# Altium PCB remora-2.PcbDoc (part 2 of 2)
Units mm, origin at the board's own origin, x right, y up, seen from the top; angles counter-clockwise.
Board outline 127 x 44.45 mm, 4 copper layers (Top Layer, GND, VCC, Bottom Layer), stack 0.778 mm thick; 128 components, 115 nets, 566 pads, 152 vias.
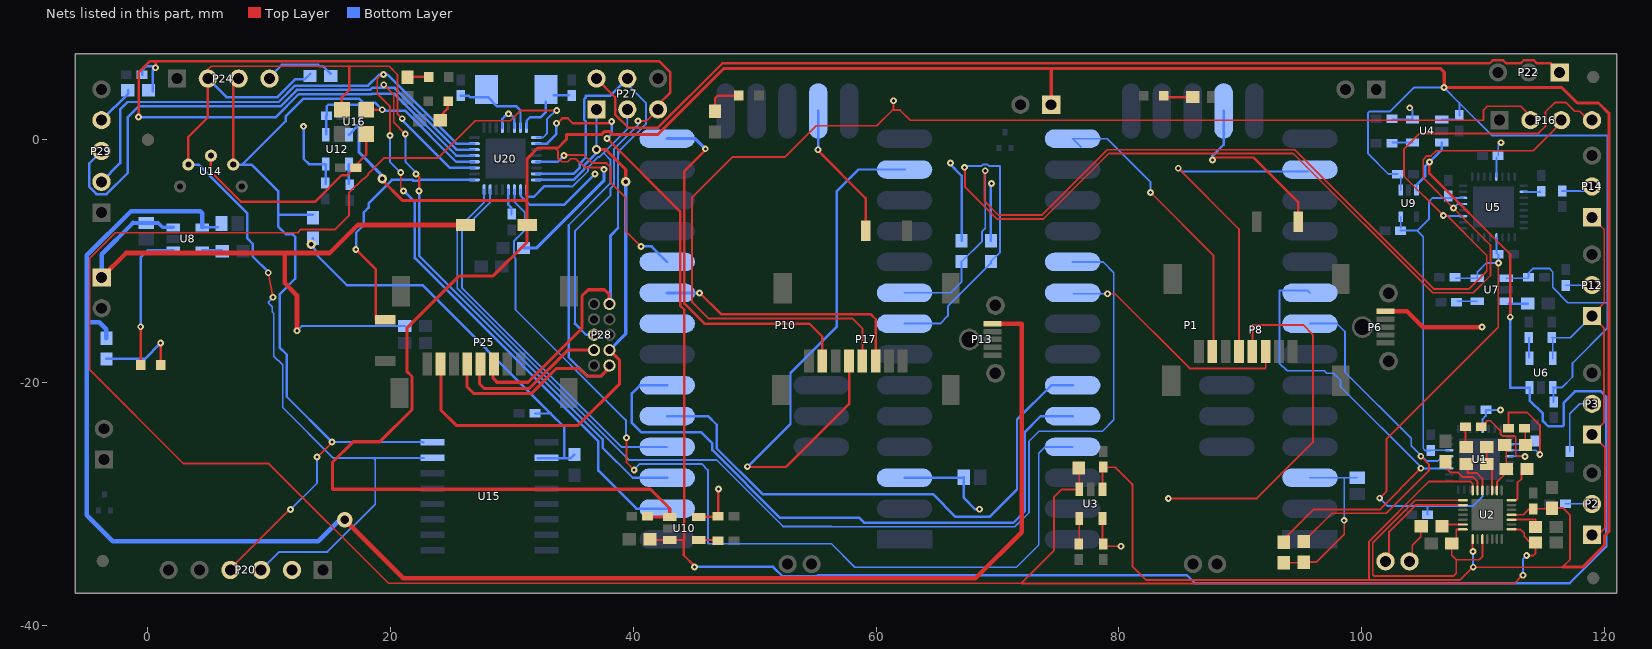
[diagram p4: the nets of this part, all layers, seen from the top]

## Via types
v1: diameter 0.559, hole 0.254, Top Layer to Bottom Layer, 141 vias
v2: diameter 0.762, hole 0.381, Top Layer to Bottom Layer, 6 vias
v3: diameter 0.5, hole 0.2, Top Layer to Bottom Layer, 4 vias
v4: diameter 1.27, hole 0.711, Top Layer to Bottom Layer, 1 vias

## Nets (pads, with @x,y where several pads share a name; then routed paths per layer and width w, separated by ;. In a path a pad name is that pad's centre, name@x,y a point inside that pad or via, vN(x,y) a via of type N, cw(c..) or ccw(c..) an arc to the next point about the centre after c; other vN are vias at no path point) (continued)
MISO: P25.7 P27.1 P28.7 U20.16 | length 51.5
  Top Layer w0.254: P25.7@24.129,-18.336 24.129,-22.26 25.399,-23.53 35.432,-23.53 38.861,-20.101 38.861,-18.171 P28.7@38.023,-17.333 ; v2(36.956,-0.797) 37.718,-0.797 39.369,-2.448 39.369,-3.083
  Bottom Layer w0.203: U20.16@31.997,-3.309 35.066,-3.309 35.94,-2.435 35.94,-2.108 36.956,-1.092 P27.1@36.956,2.505
  Bottom Layer w0.254: P28.7@38.023,-17.333 39.369,-15.986 v2(39.369,-3.464)
MISO_P: P1.12 P8.7 | length 25.4
  Top Layer w0.152: v1@82.612,-4.34 87.781,-9.509 P8.7@87.781,-17.206 ; P8.7@87.694,-17.447 P8.7@87.694,-16.874
  Bottom Layer w0.152: P1.12@76.894,-0.619 P1.12@76.183,0.092 79.044,0.092 82.6,-3.464 v1(82.6,-4.353)
MISO_R: P10.12 P17.7 | length 31.4
  Top Layer w0.203: v1@45.973,-0.797 44.195,-2.575 44.195,-13.497 45.846,-15.148 54.482,-15.148 55.563,-16.229 P17.7@55.563,-18.209
  Bottom Layer w0.254: P10.12@42.782,0.092 45.084,0.092 v1(45.922,-0.746)
MOSI: P25.3 P27.4 P28.1 U20.15 | length 51.1
  Top Layer w0.254: P25.3@28.422,-18.336 28.422,-19.619 28.726,-19.923 28.726,-19.974 31.317,-19.974 35.762,-15.529 35.762,-12.862 36.27,-12.354 37.616,-12.354 37.997,-12.735 P28.1@37.997,-13.497
  Bottom Layer w0.152: 38.734,-7.274 38.734,-1.209 ; 38.734,-0.995 41.045,1.316 41.045,3.014 P27.4@39.496,4.564
  Bottom Layer w0.203: U20.15@31.997,-2.809 35.063,-2.809 35.584,-2.288 35.584,-1.961 36.067,-1.478 36.067,1.535 35.952,1.65 35.952,3.36 36.067,3.475 36.067,3.648 38.099,3.648 P27.4@39.496,5.045 ; 38.734,-1.209 38.734,-0.995
  Bottom Layer w0.254: P28.1@38.124,-13.523 38.124,-7.884 38.734,-7.274 ; P27.4@39.496,4.564 P27.4@39.496,5.045
MOSI_P: P1.7 P8.3 | length 19.7
  Top Layer w0.152: v1(79.069,-12.684) 79.679,-12.684 85.826,-18.831 92.023,-18.831 92.094,-18.76 P8.3@92.094,-17.447
  Bottom Layer w0.152: P1.7@76.259,-12.684 v1(79.069,-12.684)
MOSI_R: P10.7 P17.3 | length 21.3
  Top Layer w0.203: v1@45.465,-12.608 47.243,-14.386 59.562,-14.386 59.963,-14.787 P17.3@59.963,-18.209
  Bottom Layer w0.254: P10.7@42.782,-12.608 v1@45.287,-12.608
  other v1: 45.44,-12.634
Net*1_1: *1.1 C63.2 U20.7 | length 6.8
  Bottom Layer w0.203: C63.2@25.779,3.633 26.429,3.633 26.541,3.521 28.013,3.521 28.775,2.759 30.352,2.759 30.697,2.414 U20.7@30.697,0.991
Net*1_2: *1.2 C64.2 U20.8 | length 4.6
  Bottom Layer w0.203: U20.8@31.197,0.991 31.197,1.572 31.495,1.87 32.384,1.87 32.765,2.251 *1.2@32.765,3.14 ; *1.2@33.436,3.663 C64.2@34.67,3.663
NetC2_1: C2.1 P2.2 | length 2.2
  Bottom Layer w0.152: C2.1@116.778,-29.982 P2.2@118.957,-29.982
NetC3_1: C3.1 P3.2 | length 5.3
  Bottom Layer w0.152: C3.1@117.144,-25.674 117.144,-22.565 117.957,-21.752 P3.2@118.982,-21.752
NetC6_1: C6.1 U1.10 | length 1.8
  Bottom Layer w0.152: U1.10@112.211,-25.074 C6.1@114.015,-25.074
NetC8_2: C8.2 U2.3 | length 2.6
  Top Layer w0.152: U2.3@112.346,-31.296 114.343,-31.296 114.343,-31.891 C8.2@114.322,-31.912
NetC11_1: C11.1 R4.1 | length 1.5
  Top Layer w0.152: R4.1@113.482,-25.308 C11.1@113.482,-23.857
NetC12_1: C12.1 R5.1 | length 1.6
  Top Layer w0.152: R5.1@108.553,-25.254 C12.1@108.553,-23.657
NetC15_1: C15.1 U3.4 | length 2
  Top Layer w0.152: C15.1@76.733,-33.252 U3.4@76.733,-31.203
NetC16_2: C16.2 U2.15 U2.21 U2.24 | length 26.7
  Top Layer w0.152: U2.21@108.346,-32.096 107.79,-32.096 107.79,-32.895 C16.2@107.427,-33.258 107.427,-34.235 107.797,-34.605 ; U2.15@108.346,-29.696 104.418,-29.696 100.913,-33.201 100.913,-35.849 101.015,-35.951 107.543,-35.951 107.797,-35.697 107.797,-34.605 ; U2.24@109.946,-32.896 109.946,-34.335 109.676,-34.605 107.797,-34.605
NetC21_1: C21.1 U4.4 | length 1.6
  Bottom Layer w0.152: C21.1@102.553,-0.223 U4.4@104.193,-0.223
NetC27_1: C27.1 U6.4 | length 1.6
  Bottom Layer w0.152: U6.4@113.775,-17.946 C27.1@113.775,-16.306
NetC28_1: C28.1 U5.10 | length 1.4
  Bottom Layer w0.152: U5.10@113.354,-4.29 C28.1@114.742,-4.29
NetC33_1: C33.1 U7.4 | length 1.6
  Bottom Layer w0.152: C33.1@107.887,-13.304 U7.4@109.527,-13.304
NetC36_1: C36.1 P12.2 | length 2.1
  Bottom Layer w0.152: C36.1@116.823,-11.988 P12.2@118.967,-11.988
NetC41_1: C41.1 P14.2 | length 2.1
  Bottom Layer w0.152: C41.1@116.509,-4.211 P14.2@118.616,-4.211
NetC42_2: C42.2 U10.4 | length 1.5
  Top Layer w0.203: U10.4@45.395,-32.973 C42.2@46.908,-32.973
NetC43_2: C43.2 U12.4 | length 1.6
  Bottom Layer w0.203: C43.2@16.554,-3.637 U12.4@16.554,-1.997
NetC65_1: C65.1 U20.20 | length 2.1
  Bottom Layer w0.203: U20.20@29.697,-4.109 29.697,-5.349 29.955,-5.607 C65.1@29.955,-6.116
NetD1_A: D1.A R11.2 | length 2.3
  Top Layer w0.203: D1.A@83.806,3.521 R11.2@86.093,3.521
NetD2_A: D2.A R13.2 | length 6.9
  Top Layer w0.203: D2.A@1.05,-18.593 v1(1.05,-16.748)
  Bottom Layer w0.203: R13.2@-3.421,-18.056 -0.257,-18.056 v1(1.05,-16.748)
NetD2_K: D2.K U8.1 | length 11.8
  Top Layer w0.203: v1(-0.601,-15.402) -0.601,-18.253 D2.K@-0.572,-18.552
  Bottom Layer w0.203: v1(-0.601,-15.402) -0.601,-9.713 -0.002,-9.113 U8.1@2.085,-9.113
NetD3_A: D3.A R17.2 | length 3.1
  Top Layer w0.203: R17.2@46.735,2.339 46.735,3.419 46.964,3.648 D3.A@48.688,3.648
NetD4_A: D4.A R27.2 | length 1.5
  Top Layer w0.203: R27.2@21.437,5.184 D4.A@22.986,5.184
NetD5_A: D5.A R29.2 | length 1.8
  Top Layer w0.203: R29.2@24.09,1.616 24.09,1.974 24.684,2.568 D5.A@24.684,3.165
NetP5_1: P5.1 R2.2 | length 2.5
  Top Layer w0.152: P5.1@104.164,-34.503 104.164,-33.401 104.869,-32.697 R2.2@104.869,-32.323
NetR3_1: R3.1 R4.2 U2.9 | length 3.8
  Top Layer w0.152: U2.9@111.146,-28.896 111.146,-28.207 111.909,-27.444 111.909,-26.705 R4.2@111.909,-25.435
NetR3_2: R3.2 U2.7 | length 3.7
  Top Layer w0.152: U2.7@112.346,-29.696 112.355,-29.687 112.731,-29.687 112.835,-29.583 112.835,-28.271 113.181,-27.924 113.181,-27.133 R3.2@113.609,-26.705
NetR5_2: R5.2 R6.1 U2.10 | length 3.1
  Top Layer w0.152: R6.1@110.307,-26.705 R5.2@110.307,-25.308 ; U2.10@110.746,-28.896 R6.1@110.746,-27.144
NetR6_2: R6.2 U2.12 | length 3.2
  Top Layer w0.152: R6.2@108.607,-26.705 108.711,-26.809 108.711,-27.467 109.505,-27.467 109.946,-27.909 U2.12@109.946,-28.896
NetR7_2: R7.2 U2.13 | length 4.3
  Top Layer w0.152: R7.2@106.917,-26.539 106.917,-26.994 107.339,-27.416 107.945,-27.416 108.301,-27.772 109.136,-27.772 109.546,-28.182 U2.13@109.546,-28.896
NetR12_2: R12.2 U8.5 | length 1.6
  Bottom Layer w0.203: U8.5@4.485,-9.113 R12.2@6.068,-9.113
OUT+: R2.1 U2.20 | length 1.6
  Top Layer w0.152: R2.1@106.754,-31.696 U2.20@108.346,-31.696
OUT-: P5.2 U2.16 | length 9.6
  Top Layer w0.152: P5.2@102.631,-34.706 102.259,-34.335 102.259,-32.286 104.449,-30.096 U2.16@108.346,-30.096
OUT_L: C11.2 U1.11 | length 9.3
  Top Layer w0.152: C11.2@112.109,-23.784 112.109,-22.469 113.644,-22.469 114.68,-23.505 v1@114.68,-25.892
  Bottom Layer w0.152: U1.11@112.211,-25.574 114.362,-25.574 v1@114.68,-25.892
  other v1: 114.68,-25.918
OUT_R: C12.2 U1.12 | length 7
  Top Layer w0.152: C12.2@109.853,-23.657 110.362,-23.148 110.615,-23.148 111.43,-23.964 111.43,-24.229 111.595,-24.394 112.572,-24.394 112.699,-24.521 112.699,-25.969 112.8,-26.07 v1@113.334,-26.07
  Bottom Layer w0.152: U1.12@112.211,-26.074 v1@113.355,-26.074
  other v1: 113.449,-26.096
PGM_P: P1.PGM P4.2 | length 14.5
  Top Layer w0.203: v1(87.705,-1.661) 87.908,-1.458 91.083,-1.458 94.79,-5.164 P4.2@94.79,-6.512
  Bottom Layer w0.203: v1(87.705,-1.661) 87.705,-1.331 88.629,-0.407 P1.PGM@88.629,2.378
PGM_R: P9.2 P10.PGM | length 11.3
  Top Layer w0.203: v1@55.168,-0.848 59.132,-4.812 P9.2@59.132,-7.274
  Bottom Layer w0.203: v1(55.219,-0.823) 55.228,-0.813 P10.PGM@55.228,2.378
PLAY_POW: R1.2 R9.2 U2.1 U3.3 U20.9 | length 201.1
  Top Layer w0.152: v1(33.679,2.403) 30.683,2.403 29.845,1.565 26.956,1.565 23.882,-1.508 19.431,-1.508 18.142,-2.797 18.142,-2.892 17.83,-3.205 17.735,-3.205 16.56,-4.379 16.56,-6.259 15.433,-7.385 12.597,-7.385 12.327,-7.655 -2.684,-7.655 -4.79,-9.761 -4.79,-18.961 2.929,-26.68 9.965,-26.68 19.82,-36.535 71.941,-36.535 71.954,-36.522 ; R9.2@76.733,-27.089 U3.3@76.733,-28.803 75.279,-28.803 74.659,-29.423 74.659,-33.817 71.954,-36.522 ; U2.1@112.346,-32.096 113.058,-32.096 113.394,-32.433 113.394,-32.674 113.902,-33.182 R1.2@114.322,-33.182 114.322,-34.083 114.156,-34.249 v1(113.597,-34.249) ; v1@113.242,-35.875 112.556,-36.56 71.992,-36.56 71.954,-36.522
  Bottom Layer w0.152: U20.9@31.997,0.191 32.569,0.191 32.876,0.498 32.876,1.692 v1@33.714,2.53 ; v1(113.283,-35.875) 113.283,-34.563 v1(113.597,-34.249)
PLAY_ST: P1.8 U20.24 | length 94.3
  Bottom Layer w0.152: U20.24@27.697,-4.109 27.697,-5.141 25.485,-7.353 25.485,-12.226 39.633,-26.375 46.846,-26.375 52.332,-31.861 56.343,-31.861 56.369,-31.887 71.434,-31.887 72.592,-30.728 72.592,-24.835 73.414,-24.013 78.647,-24.013 79.577,-23.082 79.577,-10.948 78.698,-10.068 P1.8@76.183,-10.068
PLAY_STATUS: P1.2 U20.19 | length 79.8
  Top Layer w0.152: v1(39.429,-24.546) 39.429,-26.578 v1(40.064,-27.213)
  Bottom Layer w0.152: U20.19@30.197,-4.109 30.197,-5.103 31.047,-5.953 31.047,-7.447 30.4,-8.095 30.379,-8.095 30.379,-8.121 30.169,-8.33 30.169,-9.654 30.285,-9.77 30.285,-14.005 39.378,-23.098 v1@39.378,-24.597 ; v1@40.09,-27.137 40.521,-26.705 45.627,-26.705 46.135,-27.213 46.135,-33.284 56.32,-33.284 58.251,-35.214 71.56,-35.214 73.389,-33.385 73.389,-25.842 73.922,-25.308 P1.2@76.183,-25.308
POW: C35.2 P19.1 P21.1 R18.2 U8.3 | length 56.7
  Top Layer w0.381: P21.1@-3.811,-11.338 -1.804,-9.332 11.261,-9.332 ; v1(12.277,-15.732) 12.277,-12.811 11.261,-11.795 11.261,-9.332 ; P19.1@26.161,-7.02 17.271,-7.02 14.96,-9.332 11.261,-9.332
  Bottom Layer w0.152: v1(12.277,-15.732) 12.658,-15.351 R18.2@21.171,-15.351
  Bottom Layer w0.305: -1.233,-6.855 C35.2@-0.144,-6.855 0.85,-6.855 1.208,-7.213 U8.3@2.085,-7.213
  Bottom Layer w0.381: P21.1@-3.811,-11.338 -3.811,-9.433 -1.233,-6.855
REC_STATUS: P10.2 U20.23 | length 31.4
  Bottom Layer w0.152: U20.23@28.197,-4.109 28.197,-5.146 27.91,-5.433 25.866,-7.477 25.866,-12.176 38.997,-25.308 P10.2@42.782,-25.308
RESET: C62.1 P27.5 P28.6 R24.1 U20.29 | length 109.1
  Top Layer w0.152: v1(40.382,1.543) 41.074,1.543 P27.5@42.036,2.505
  Top Layer w0.203: v1@-0.763,1.87 -0.763,5.553 0.167,6.483 42.122,6.483 43.052,5.553 43.052,3.902 42.036,2.886 P27.5@42.036,2.505 ; v1(0.634,5.934) 0.634,6.458
  Bottom Layer w0.152: 35.178,-15.148 35.178,-7.528 38.099,-4.607 38.099,-4.022 38.404,-3.717 38.404,-0.746 40.385,1.235 v1@40.385,1.514
  Bottom Layer w0.203: v1@-0.636,1.87 10.54,1.87 12.42,3.749 18.439,3.749 18.465,3.775 20.319,3.775 25.403,-1.309 U20.29@26.897,-1.309 ; C62.1@-0.485,5.35 -0.485,5.72 -0.144,6.061 v1@0.507,6.061 ; R24.1@0.415,3.992 0.415,5.715 v1(0.634,5.934) ; 35.178,-15.148 36.092,-16.063 P28.6@36.753,-16.063
  other v1: -0.779,1.886
RXD: P10.1 P29.3 U20.30 | length 87.4
  Top Layer w0.152: v1(19.43,4.537) 20.252,3.715 20.252,1.429 v1(21.208,0.473)
  Top Layer w0.203: v1(22.097,-2.829) 22.335,-3.067 v1(22.335,-4.21)
  Bottom Layer w0.152: v1(21.208,0.473) 21.208,-1.813 21.97,-2.575
  Bottom Layer w0.203: P29.3@-3.827,-0.924 -4.831,-1.928 -4.831,-3.88 -4.243,-4.468 -3.411,-4.468 -1.655,-2.712 -1.655,1.867 -0.763,2.759 10.921,2.759 12.267,4.105 18.292,4.105 18.47,4.283 v1@19.43,4.283 ; v1(19.43,4.537) v1@19.43,4.283 ; v1@22.351,-4.226 22.351,-9.56 37.465,-24.674 37.465,-25.369 39.945,-27.848 P10.1@42.782,-27.848 ; U20.30@26.897,-0.809 25.411,-0.809 20.319,4.283 v1@19.43,4.283
RXD_R: P1.3 P10.4 | length 53.1
  Bottom Layer w0.203: P10.4@42.782,-20.228 40.537,-20.228 39.877,-20.889 39.877,-23.327 40.639,-24.089 45.567,-24.089 46.506,-25.029 46.506,-25.568 52.088,-31.15 58.622,-31.15 59.029,-31.557 71.297,-31.557 72.262,-30.591 72.262,-24.064 73.557,-22.768 P1.3@76.183,-22.768
SCK: P25.5 P27.3 P28.9 U20.17 | length 51.3
  Top Layer w0.254: P25.5@26.288,-18.336 26.288,-20.355 26.821,-20.889 31.611,-20.889 33.669,-18.831 35.508,-18.831 36.143,-19.466 37.337,-19.466 37.896,-18.907 P28.9@37.896,-18.577
  Bottom Layer w0.152: 34.67,-7.02 38.099,-3.591 38.099,-1.635 37.616,-1.153 ; 34.67,-3.845 34.997,-3.845 36.27,-2.572 36.27,-2.245 37.108,-1.407 37.209,-1.407 39.496,0.881 P27.3@39.496,2.505
  Bottom Layer w0.203: U20.17@31.197,-4.109 31.197,-4.61 31.277,-4.69 31.793,-4.69 32.638,-3.845 34.67,-3.845 ; 34.67,-7.02 34.67,-17.923 36.213,-19.466 37.337,-19.466 P28.9@37.845,-18.958
  Bottom Layer w0.254: P28.9@37.845,-18.958 P28.9@37.845,-18.577
SCK_P: P1.14 P8.5 | length 28
  Top Layer w0.152: v1(84.886,-2.347) 89.894,-7.355 P8.5@89.894,-17.447
  Bottom Layer w0.152: v1(84.886,-2.347) 85.14,-2.601 P1.14@95.589,-2.601
SCK_R: P10.14 P17.5 | length 46.6
  Top Layer w0.203: v1@49.386,-26.959 52.577,-26.959 57.763,-21.773 P17.5@57.763,-18.209 P17.5@58.038,-18.484
  Bottom Layer w0.203: v1@49.399,-26.946 52.942,-23.403 52.942,-19.212 56.743,-15.412 56.743,-4.252 58.546,-2.448 P10.14@62.34,-2.448
  other v1: 49.386,-26.934
SCL: P20.4 P24.3 R28.1 U14.4 U15.16 U16.3 U20.28 | length 84.4
  Top Layer w0.152: P20.4@6.866,-35.265 v1@11.718,-30.414 ; v1@13.978,-26.096 v1(15.172,-24.902)
  Top Layer w0.203: U14.4@7.03,-2.045 P24.3@7.03,4.599 ; U16.3@17.985,2.473 v1(19.303,2.473)
  Bottom Layer w0.152: v1(11.743,-30.464) 13.928,-28.28 v1(13.928,-26.146) ; v1(15.172,-24.902) 22.684,-24.902 U15.16@22.709,-24.927
  Bottom Layer w0.203: U14.4@7.03,-2.045 7.768,-2.045 ; R28.1@13.588,-6.17 10.755,-6.17 ; v1(15.172,-24.902) 11.438,-21.168 11.438,-17.701 10.843,-17.105 10.843,-12.734 12.124,-11.452 12.124,-7.985 11.908,-7.769 11.352,-7.769 10.755,-7.173 10.755,-6.17 ; U20.28@26.897,-1.809 25.395,-1.809 21.208,2.378 19.398,2.378 v1(19.303,2.473) 18.743,3.033 17.754,3.033 17.393,3.394 12.816,3.394 11.343,1.921 11.343,1.529 7.768,-2.045 ; 7.768,-2.045 8.546,-2.045 10.755,-4.254 10.755,-6.17
SCL_P: P1.19 R10.1 U1.29 | length 32.8
  Top Layer w0.152: R10.1@95.233,-33.094 97.558,-30.769 102.04,-30.769 105.545,-27.264 105.545,-26.74 v1(104.876,-26.07)
  Bottom Layer w0.152: P1.19@95.741,-15.148 97.967,-15.148 98.627,-15.809 98.627,-19.136 104.088,-24.597 104.088,-25.219 105.345,-26.477 106.247,-26.477 106.65,-26.074 U1.29@107.211,-26.074
SCL_R: P10.19 P16.3 R15.1 U5.29 | length 100.1
  Top Layer w0.152: v1@67.309,-2.245 67.309,-3.87 69.951,-6.512 73.785,-6.512 79.17,-1.127 94.361,-1.127 105.842,-12.608 109.19,-12.608 110.616,-11.182 110.616,-8.671 v1(107.568,-5.623) 105.079,-3.134 105.079,-1.628 105.376,-1.331 105.714,-1.331 106.146,-0.899 114.155,-0.899 116.442,1.388 P16.3@116.442,1.616
  Bottom Layer w0.152: P10.19@62.34,-15.148 65.277,-15.148 65.912,-14.513 65.912,-13.726 69.452,-10.186 R15.1@69.452,-10.029 70.205,-9.277 70.205,-2.169 69.323,-2.169 69.196,-2.042 68.775,-2.042 68.648,-2.169 67.385,-2.169 v1(67.284,-2.27) ; v1@107.679,-5.496 107.695,-5.496 107.901,-5.29 U5.29@108.354,-5.29
SDA: P20.3 P24.2 R26.1 U14.2 U15.15 U16.4 U20.27 | length 102.4
  Top Layer w0.152: P24.2@4.936,5.791 5.206,6.061 16.585,6.061 19.878,6.061 20.557,5.382 20.557,2.14 v1(20.954,1.743) ; v1(9.914,-10.957) v1(10.31,-12.975)
  Top Layer w0.203: U14.2@3.33,-2.045 3.33,0.248 4.936,1.854 P24.2@4.936,5.045 P24.2@4.936,5.791 ; U16.4@15.985,2.473 15.985,3.505 16.585,4.105 16.585,6.061
  Bottom Layer w0.152: P20.3@9.33,-35.468 P20.3@9.33,-35.443 10.818,-33.955 14.783,-33.955 18.728,-30.009 18.728,-26.353 18.598,-26.223 ; v1(10.31,-12.975) 9.947,-13.337 9.947,-13.464 10.243,-13.76 10.243,-14.182 10.372,-14.31 10.372,-17.816 11.108,-18.552 11.108,-22.058 15.273,-26.223 18.598,-26.223 ; U15.15@22.735,-26.223 18.598,-26.223
  Bottom Layer w0.203: U14.2@3.33,-2.045 4.152,-2.045 8.19,-6.083 8.19,-8.126 8.638,-8.574 8.638,-9.605 v1@9.965,-10.932 ; P24.2@4.936,5.045 6.46,3.521 10.677,3.521 12.15,4.994 12.941,4.994 R26.1@13.373,5.426 ; v1@20.89,1.679 24.879,-2.309 U20.27@26.897,-2.309
SDA_P: P1.18 R8.1 U1.27 | length 40.4
  Top Layer w0.152: R8.1@93.582,-33.145 93.582,-32.903 96.02,-30.464 101.472,-30.464 v1(104.876,-27.061)
  Bottom Layer w0.152: P1.18@95.741,-12.608 95.554,-12.421 93.226,-12.421 93.226,-18.409 93.852,-19.034 96.935,-19.034 97.138,-19.238 97.675,-19.238 98.256,-19.818 98.256,-20.355 104.975,-27.074 U1.27@107.211,-27.074
SDA_R: P10.18 P16.4 R14.1 U5.27 | length 100.1
  Top Layer w0.152: v1@68.935,-2.601 68.935,-5.064 70.078,-6.207 73.659,-6.207 79.044,-0.823 94.487,-0.823 105.968,-12.303 108.835,-12.303 110.311,-10.827 110.311,-9.535 107.009,-6.233 v1(106.73,-6.233) 103.479,-2.982 103.479,-0.797 104.799,0.524 114.562,0.524 115.147,1.108 115.147,2.302 115.909,3.064 116.848,3.064 117.56,2.352 117.957,2.352 118.693,1.616 P16.4@118.982,1.616
  Bottom Layer w0.152: P10.18@62.34,-12.608 66.141,-12.608 67.039,-11.71 R14.1@67.039,-10.029 68.723,-8.345 68.723,-7.551 68.985,-7.289 v1(68.985,-2.55) ; v1@106.672,-6.29 U5.27@108.354,-6.29
SGTL_EN_R: P10.6
SPOW: C9.2 C10.1 C13.1 C20.1 C25.1 C30.1 C32.1 C37.1 C39.1 P18.1 P19.2 R20.2 U2.4 U2.14 U2.22 U3.1 U4.1 U6.1 U7.1 U9.1 U10.1 U12.1 U12.3 | length 387.7
  Top Layer w0.152: 33.527,-0.67 33.781,-0.924 33.781,-1.516 34.079,-1.813 34.587,-1.813 34.841,-1.559 35.261,-1.559 35.973,-2.27 v1@37.413,-2.27 ; U3.1@78.633,-28.803 C13.1@78.633,-27.064 ; C13.1@78.723,-26.974 79.715,-26.974 81.111,-28.37 81.111,-35.138 82.228,-36.256 100.608,-36.256 108.127,-36.256 v1@109.168,-35.214 ; 100.608,-36.179 100.608,-33.075 105.53,-28.153 108.974,-28.153 109.146,-28.325 U2.14@109.146,-28.896 ; v1@109.146,-33.865 U2.22@109.146,-32.896 ; v1(109.194,-35.214) 116.534,-35.214 117.169,-34.579 117.169,-30.922 116.597,-30.349 C9.2@115.68,-30.349 ; U2.4@112.346,-30.896 113.308,-30.896 113.801,-30.403 C10.1@114.156,-30.403 C9.2@115.626,-30.403
  Top Layer w0.254: 15.198,-28.763 15.198,-28.757 ; v2@19.239,-3.274 20.954,-4.988 31.241,-4.988 ; v1@37.413,-2.27 v1(37.575,-2.432) ; C39.1@41.212,-31.073 U10.1@42.995,-31.073 42.995,-30.373 41.411,-28.789 15.229,-28.789 15.198,-28.757 ; 74.421,5.858 47.421,5.858 41.985,0.422 38.305,0.422 38.06,0.667 37.598,0.667 37.353,0.422 34.492,0.422 34.492,0.041 33.781,-0.67 33.527,-0.67 32.13,-0.67 31.241,-1.559 31.241,-4.988 ; 74.421,5.883 106.476,5.883 106.806,5.553 v1@106.806,4.299 ; v1(106.79,4.299) v1@106.806,4.299 ; 116.534,-35.214 118.21,-35.214 120.011,-33.413 120.011,-32.621 120.395,-32.237 120.395,2.159 119.515,3.038 117.774,3.038 116.513,4.299 v1@106.806,4.299 ; 15.198,-28.757 15.198,-26.583 16.905,-24.876 19.108,-24.876 21.755,-22.229 21.755,-19.497 21.335,-19.078 21.335,-15.529 25.653,-11.211 28.447,-11.211 31.241,-8.417 P19.2@31.241,-7.02 31.241,-4.988
  Top Layer w0.305: P18.1@74.421,2.886 74.421,5.858
  Bottom Layer w0.152: C37.1@102.965,-2.829 102.212,-2.829 100.508,-1.126 100.508,2.188 100.642,2.321 102.33,2.321 104.307,4.299 v1(106.79,4.299) 108.06,3.029 ; U9.1@103.219,-4.142 C37.1@103.219,-3.083 ; U4.1@106.593,1.677 C20.1@107.725,1.677 ; C20.1@108.06,2.012 108.06,3.029 ; v1@109.168,-35.113 v1(109.168,-33.919) ; U7.1@111.927,-11.404 C32.1@113.694,-11.404 ; C32.1@113.76,-11.338 113.76,-10.963 114.121,-10.602 115.447,-10.602 115.739,-10.893 115.739,-12.161 116.999,-13.421 120.217,-13.421 ; U6.1@115.741,-20.412 116.503,-20.412 117.372,-19.542 117.372,-18.399 120.243,-15.529 120.243,0.346 110.743,0.346 108.06,3.029 ; C25.1@115.807,-21.595 U6.1@115.807,-20.478
  Bottom Layer w0.203: U12.1@14.7,0.449 C30.1@14.7,1.997 ; C30.1@14.731,2.028 14.731,2.759 14.858,2.886 17.398,2.886 17.398,1.247 U12.3@16.554,0.403
  Bottom Layer w0.254: 17.398,1.247 17.398,-1.051 19.303,-2.956 v2(19.303,-3.21) ; R20.2@30.948,-8.925 32.003,-8.925 37.591,-3.337 v1@37.591,-2.448
STOP: P26.2 U20.25 | length 20.3
  Top Layer w0.203: v1(17.128,-9.036) 18.779,-10.687 P26.2@18.779,-14.845
  Bottom Layer w0.203: v1@17.144,-9.052 17.144,-7.655 17.779,-7.02 17.779,-5.98 18.177,-5.582 18.177,-5.234 20.102,-3.309 21.823,-3.309 21.876,-3.363 22.318,-3.363 22.371,-3.309 U20.25@26.897,-3.309
TEENSY_POW: R16.2 R25.1 U4.3 U6.3 U7.3 U9.3 U10.3 U20.10 | length 180.9
  Top Layer w0.203: v1(33.654,1.362) 33.732,1.362 34.144,1.774 34.586,1.774 34.998,1.362 v1@38.226,1.362 ; v1@37.845,0.092 43.839,-5.903 43.839,-13.644 44.195,-14 44.195,-32.928 44.15,-32.973 ; R16.2@41.423,-32.973 U10.3@42.995,-32.973 44.15,-32.973 ; v1@45.033,-35.113 44.15,-34.229 44.15,-32.973 ; v1(105.587,-1.839) 105.587,-2.778 112.242,-9.433 v1(112.242,-14.615)
  Bottom Layer w0.203: U20.10@31.997,-0.309 32.882,-0.309 33.654,0.463 v1(33.654,1.362) ; v1(37.829,0.108) 38.21,0.489 v1(38.21,1.505) ; v1(45.033,-35.189) 51.513,-35.189 52.288,-35.964 55.104,-35.964 55.193,-35.875 85.6,-35.875 86.26,-36.535 117.128,-36.535 120.141,-33.522 120.141,-21.168 119.709,-20.736 117.576,-20.736 116.661,-21.651 116.661,-23.505 116.567,-23.599 115.352,-23.599 114.934,-23.181 114.934,-22.565 113.841,-21.472 U6.3@113.841,-20.412 112.261,-20.412 112.261,-13.638 ; U9.3@104.519,-4.142 104.519,-3.694 104.56,-3.694 105.257,-2.997 105.257,-2.169 v1(105.587,-1.839) 106.593,-0.832 U4.3@106.593,-0.223 ; U7.3@112.12,-13.497 R25.1@113.687,-13.497
TEENSY_ST: P10.8 U20.13 | length 16.7
  Top Layer w0.152: v1(34.289,-1.305) 34.34,-1.254 35.945,-1.254 36.605,-1.915 37.776,-1.915 38.099,-2.238 38.099,-3.487 39.369,-4.757 39.369,-7.528 v1@40.512,-8.671
  Bottom Layer w0.203: U20.13@31.997,-1.809 33.785,-1.809 v1@34.162,-1.432 ; v1(40.623,-8.782) 41.496,-8.782 P10.8@42.782,-10.068
TXD: P10.0 P29.2 U20.31 | length 86.8
  Top Layer w0.152: v1(19.414,5.375) 19.22,5.375 18.89,5.045 18.89,3.807 19.938,2.759 v1(19.938,0.346) ; v1(20.827,-2.702) 20.827,-3.972 v1(21.065,-4.21)
  Bottom Layer w0.152: v1(19.938,0.346) 19.938,-1.813 v1(20.827,-2.702)
  Bottom Layer w0.203: P29.2@-3.827,-3.464 -2.287,-1.924 -2.287,2.505 -1.677,3.114 10.774,3.114 12.12,4.461 18.145,4.461 19.059,5.375 19.73,5.375 25.414,-0.309 U20.31@26.897,-0.309 ; v1@21.081,-4.226 21.995,-5.141 21.995,-9.754 37.11,-24.868 37.11,-27.256 40.242,-30.388 P10.0@42.782,-30.388
TXD_R: P1.4 P10.3 | length 45.8
  Bottom Layer w0.203: P10.3@42.782,-22.768 46.151,-22.768 46.862,-23.479 46.862,-25.421 50.635,-29.194 64.667,-29.194 66.547,-31.074 69.341,-31.074 71.602,-28.813 71.602,-23.048 74.421,-20.228 P1.4@76.183,-20.228
VA: C4.1 C19.1 C22.1 U1.5 U4.5 U5.5 | length 8.3
  Bottom Layer w0.152: C19.1@102.553,1.677 U4.5@104.193,1.677 104.193,2.4 v1(103.961,2.632) ; U1.5@109.961,-23.824 109.961,-23.017 110.234,-22.744 C4.1@110.234,-22.26 v1(111.429,-22.26) ; U5.5@111.104,-3.04 C22.1@111.104,-1.451 ; C22.1@111.25,-1.305 111.25,-0.468 v1(111.48,-0.238)
VCC: C47.1 C51.2 C53.2 P20.2 P22.1 P24.4 P25.4 P27.2 P28.8 P29.4 R22.1 R24.2 R26.2 R28.2 U12.5 U14.3 U15.2 U16.2 U20.4 U20.6 U20.18 | length 176.6
  Top Layer w0.203: U14.3@5.19,-1.305 5.19,-2.635 7.644,-5.09 13.791,-5.09 15.956,-2.925 16.414,-2.925 17.018,-2.321 C53.2@17.159,-2.321 17.159,-2.052 17.985,-1.226 U16.2@17.985,0.473 ; P27.2@36.956,5.045 38.492,3.509 38.492,2.089 39.571,1.01 42.034,1.01 47.314,6.289 110.552,6.289 110.819,6.557 111.651,6.557 111.918,6.289 113.092,6.289 113.359,6.557 114.191,6.557 114.458,6.289 115.578,6.289 P22.1@116.315,5.553
  Top Layer w0.254: P25.4@27.329,-18.336 27.329,-20.127 27.685,-20.482 31.443,-20.482 34.618,-17.307 36.194,-17.307
  Bottom Layer w0.152: C51.2@31.875,-22.54 33.181,-22.54
  Bottom Layer w0.203: P29.4@-3.827,1.616 -1.613,3.83 R24.2@-1.613,4.08 ; P24.4@10.016,5.045 10.016,5.156 11.04,6.18 14.028,6.18 14.147,6.061 14.438,6.061 R26.2@15.073,5.426 ; v1@12.826,0.981 12.826,-1.559 13.264,-1.997 U12.5@14.654,-1.997 C47.1@14.654,-3.637 ; R28.2@13.588,-8.124 13.588,-8.481 v2(13.461,-8.608) 13.461,-8.759 13.796,-9.093 13.796,-9.387 16.382,-11.973 22.614,-11.973 33.181,-22.54 34.296,-23.655 34.296,-26.169 34.349,-26.223 ; U20.4@29.197,0.991 29.197,1.731 29.463,1.997 29.971,1.997 30.197,1.771 U20.6@30.197,0.991 ; U20.18@30.697,-4.109 30.697,-4.613 31.454,-5.369 34.289,-5.369 v1(36.829,-2.829) ; U15.2@32.105,-26.223 34.349,-26.223 ; R22.1@35.137,-25.931 34.845,-26.223 34.349,-26.223
  other v1: 12.826,1.108 29.701,2.14
VCC_PLAY: C7.2 C14.1 P1.3.3V P8.4 R8.2 R10.2 U3.5 | length 47.9
  Top Layer w0.152: C14.1@78.633,-33.204 U3.5@78.633,-31.203 ; C14.1@78.916,-33.487 v1(80.161,-33.487) ; v1@84.098,-29.55 91.363,-29.55 95.986,-24.927 95.986,-16.063 95.173,-15.25 91.007,-15.25 91.007,-17.434 P8.4@90.994,-17.447 ; R8.2@93.582,-34.845 R10.2@95.182,-34.845 ; R10.2@95.233,-34.794 96.263,-34.794 98.56,-32.496 v1(98.56,-31.353)
  Bottom Layer w0.152: P1.3.3V@95.741,-27.848 98.56,-27.848 ; v1@98.332,-31.353 98.56,-31.125 98.56,-27.848 ; C7.2@99.63,-27.848 98.56,-27.848
  other v1: 84.073,-29.55
VCC_REC: C29.2 C40.1 P10.3.3V P16.2 P17.4 R14.2 R15.2 U10.5 | length 124.2
  Top Layer w0.152: P17.4@58.863,-18.209 58.863,-15.541 58.038,-14.716 46.176,-14.716 44.83,-13.37 44.83,-4.752 48.176,-1.407 52.501,-1.407 55.066,1.159 60.052,1.159 61.347,2.454 ; 61.426,2.454 61.957,2.454 62.795,1.616 110.041,1.616 110.041,2.454 110.346,2.759 113.115,2.759 113.902,1.971 P16.2@113.902,1.616 ; 61.426,2.532 v1(61.426,3.216)
  Top Layer w0.203: U10.5@45.395,-31.073 C40.1@46.908,-31.073 ; C40.1@46.974,-31.007 v1@46.974,-28.752
  Bottom Layer w0.203: P10.3.3V@62.34,-27.848 C29.2@67.077,-27.848 ; v1@66.039,-1.966 67.039,-2.966 R14.2@67.039,-8.329 ; C29.2@67.22,-27.797 67.22,-29.512 68.147,-30.439 v1(68.503,-30.439) ; R15.2@69.452,-8.329 v1@69.452,-3.658
  other v1: 47.014,-28.763 69.493,-3.591 66.115,-1.915
VDDD: C1.1 C17.1 C38.1 U1.30 U5.30 U9.5 | length 28.4
  Bottom Layer w0.152: C38.1@103.214,-7.477 104.571,-7.477 ; C38.1@103.219,-7.274 U9.5@103.219,-6.342 ; C1.1@105.688,-25.603 105.246,-25.603 105.079,-25.435 105.079,-7.985 104.571,-7.477 ; C1.1@105.717,-25.574 U1.30@107.211,-25.574 ; U5.30@108.354,-4.79 105.836,-4.79 105.561,-5.064 105.561,-6.487 104.571,-7.477
VDDIO: C5.1 C26.1 C31.1 U1.20 U5.20 U7.5 | length 40
  Top Layer w0.152: v1(101.481,-29.525) 102.056,-28.95 102.056,-24.648 111.251,-15.453 v1@111.251,-10.144
  Bottom Layer w0.152: v1(101.481,-29.525) 102.142,-30.185 109.143,-30.185 109.961,-29.367 U1.20@109.961,-28.824 ; C5.1@105.424,-30.896 105.424,-30.297 ; C31.1@107.76,-11.404 U7.5@109.527,-11.404 109.527,-10.903 110.286,-10.144 111.251,-10.144 111.276,-10.119 111.276,-9.49 C26.1@111.22,-9.433 ; C26.1@111.104,-9.317 U5.20@111.104,-8.04
  other v1: 111.276,-10.144
VH: C24.1 P2.1 P3.1 P12.1 P14.1 U6.5 | length 34.7
  Top Layer w0.152: P2.1@118.982,-32.547 119.481,-32.547 120.039,-31.988 120.039,-25.35 P3.1@118.982,-24.292 119.961,-23.314 119.961,-15.492 P12.1@118.982,-14.513 118.982,-14.428 119.989,-13.421 119.989,-7.392 P14.1@118.982,-6.385
  Bottom Layer w0.152: C24.1@115.68,-16.306 117.189,-16.306 P12.1@118.982,-14.513 ; U6.5@115.741,-18.012 C24.1@115.741,-16.367
XVUSB: C34.2 P13.1 R13.1 U8.4 | length 139.3
  Top Layer w0.381: v4(16.214,-31.303) 21.027,-36.116 68.185,-36.116 71.983,-32.319 71.983,-15.148 P13.1@69.579,-15.148
  Bottom Layer w0.203: U8.4@4.485,-7.213 C34.2@5.737,-7.213
  Bottom Layer w0.381: R13.1@-3.421,-16.356 -3.421,-15.605 -4.005,-15.021 -5.047,-15.021 ; U8.4@4.485,-7.213 4.485,-6.045 4.317,-5.877 -1.398,-5.877 -5.047,-9.526 -5.047,-15.021 ; v4(16.214,-31.303) 16.043,-31.473 15.63,-31.473 14.022,-33.081 -2.887,-33.081 -5.047,-30.921 -5.047,-15.021
XVUSB_P: P6.1 | length 8.5
  Top Layer w0.381: P6.1@101.964,-14.132 103.733,-14.132 105.053,-15.453 v1@109.914,-15.453
  other v1: 109.914,-15.428
pads on no net: P1.0 P1.1 P1.3.3V2 P1.5 P1.6 P1.15 P1.16 P1.20 P1.21 P1.A10 P1.A11 P1.A14 P1.AGND P1.AREF P1.GND2 P1.Vin P6. P6.4 P8.0 P8.1 P8.8 P10.3.3V2 P10.15 P10.16 P10.20 P10.21 P10.A10 P10.A11 P10.A14 P10.AGND P10.AREF P10.GND2 P10.Vin P13. P13.4 P17.0 P17.1 P17.8 P20.5 P20.6 P25.0 P25.1 P25.8 P28.3 P28.4 P28.5 U1.2 U1.4 U1.6 U1.8 U1.9 U1.16 U1.17 U1.18 U1.19 U1.22 U1.28 U2.2 U2.5 U2.6 U2.8 U2.11 U2.17 U2.19 U2.23 U2.25 U2.28 U5.2 U5.4 U5.6 U5.8 U5.9 U5.11 U5.12 U5.16 U5.17 U5.18 U5.19 U5.22 U5.28 U9.4 U14.1 U15.1 U15.4
copper on no net: | length 2.4
  Bottom Layer w0.254: 98.662,4.156 101.091,4.156

## Polygon pours and split planes (outlines as drawn)
DGND on GND (split plane): 99.92,-36.863 -5.476,-36.863 -5.476,6.566 99.92,6.566
AGND on GND (split plane): 120.504,-36.863 100.179,-36.863 100.179,6.566 120.504,6.566
VCC_REC on VCC (split plane): 73.25,-36.863 44.274,-36.863 44.274,6.566 73.25,6.566
VCC on VCC (split plane): 44.015,-36.863 -5.476,-36.863 -5.476,6.566 44.015,6.566
VA on VCC (split plane): 120.504,-36.863 100.204,-36.863 100.204,6.566 120.504,6.566
VCC_PLAY on VCC (split plane): 99.946,-36.863 73.509,-36.863 73.509,6.566 99.946,6.566

## Other copper
GND (plane layer: these items are gaps in the copper):
  lines w0.254: 100.05,-37.399 100.05,7.077
VCC (plane layer: these items are gaps in the copper):
  lines w0.254: 44.144,-37.653 44.144,6.747 ; 73.38,-37.272 73.38,7.128 ; 100.075,-37.373 100.075,7.026

## Silkscreen, mask and mechanical layers (free items; w line width, h text height)
Top Overlay:
  circle w0.254: c93.011,-15.8 r11.43
  circle w0.254: c93.086,-15.65 r14.707
  circle w0.254: c60.88,-16.689 r11.43
  circle w0.254: c60.955,-16.539 r14.707
  circle w0.254: c28.495,-16.435 r11.43
  circle w0.254: c28.57,-16.285 r14.707
  text "G" at 2.777,6.95 h1.52 r180
  text "D" at 5.19,6.95 h1.52 r180
  text "C" at 7.857,6.95 h1.52 r180
  text "V" at 10.397,6.95 h1.52 r180
  text "-" at 71.627,6.188 h1.52 r180
  text "V+" at 75.056,6.061 h1.52 r180
  text "RECORD" at 46.973,5.096 h2.54
  text "MOTION" at 26.196,4.842 h2.54
  text "PLAY (REC2)" at 80.298,4.842 h2.54
  text "G" at -5.859,4.664 h1.52 r270
  text "G" at 111.743,4.41 h1.52 r180
  text "H" at 114.156,4.41 h1.52 r180
  text "V" at 116.95,4.41 h1.52 r180
  text "V" at -5.859,2.124 h1.52 r270
  text "BURN2" at 75.462,1.235 h1.52 r180
  text "D" at 118.22,1.108 h1.52 r180
  text "V" at 114.512,0.295 h1.52 r180
  text "C" at 117.026,0.244 h1.52 r180
  text "G" at 111.921,0.219 h1.52 r180
  text "Rx" at -5.859,-0.289 h1.52 r270
  text "V" at 4.809,-0.289 h1.52
  text "C" at 7.476,-1.813 h1.52
  text "G" at 117.966,-1.813 h1.52 r90
  text "D" at 1.888,-1.94 h1.52
  text "Tx" at -5.859,-2.702 h1.52 r270
  text "G" at 8.619,-4.226 h1.52
  text "R1" at 117.966,-4.48 h1.52 r90
  text "DTR" at -5.859,-4.988 h1.52 r270
  text "V" at 118.093,-6.766 h1.52 r90
  text "PGM" at 87.384,-7.401 h1.52
  text "PGM" at 55.431,-8.062 h1.52
  text "ON" at 32.638,-8.163 h1.52
  text "CHG" at 67.547,-9.154 h1.52 r270
  text "G" at 117.839,-9.814 h1.52 r90
  text "V" at -5.716,-10.83 h1.52 r270
  text "BAT" at -2.922,-11.592 h1.52 r270
  text "L1" at 117.839,-12.735 h1.52 r90
  text "G" at -5.716,-13.497 h1.52 r270
  text "V" at 117.966,-14.894 h1.52 r90
  text "CHG" at 3.082,-18.933 h1.52
  text "G" at 117.839,-19.72 h1.52 r90
  text "ST" at 19.592,-21.27 h1.52 r90
  text "IMU_INT" at -4.437,-21.676 h1.52
  text "R2" at 117.839,-22.387 h1.52 r90
  text "V" at 117.966,-24.673 h1.52 r90
  text "G" at 117.966,-27.975 h1.52 r90
  text "BURN1" at -4.183,-29.347 h1.52
  text "L2" at 117.966,-30.642 h1.52 r90
  text "V" at 118.093,-32.928 h1.52 r90
  text "SPKR" at 101.142,-33.411 h1.52
  text "Loggerhead" at 58.403,-33.944 h3.05
  text "Remora 2.2" at 58.403,-36.611 h3.05
  text "-" at 101.904,-36.84 h1.52
  text "-" at 87.994,-36.992 h1.52
  text "+" at 103.631,-37.018 h1.52
  text "-" at 54.466,-37.119 h1.52
  text "+" at 85.708,-37.119 h1.52
  text "+" at 52.307,-37.246 h1.52
Bottom Overlay:
  lines w0.254: 20.099,-11.322 -5.224,-11.322 -5.224,-36.611 20.236,-36.611 20.236,-11.339
Mechanical 1:
  the board outline again, w0.254
Mechanical 13:
  lines w0.254: 120.76,-32.293 108.695,-32.293 108.695,4.664 120.837,4.664 120.837,-32.293

## Text inside footprints (layer, text, board x,y; h text height)
C7: Bottom Overlay "+" at 100.024,-27.239 h0.5 r270
C29: Bottom Overlay "+" at 66.623,-27.416 h0.5
C34: Bottom Overlay "+" at 5.46,-6.512 h0.5
C35: Bottom Overlay "+" at 0.237,-6.258 h0.5 r270
P27: Top Overlay "MI" at 34.273,1.997 h1.27; Top Overlay "V" at 34.629,3.699 h1.27; Top Overlay "R" at 43.56,1.997 h1.27; Top Overlay "G" at 43.56,4.537 h1.27